# Altium PCB PCB1.PcbDoc
Units mm, origin at the board's own origin, x right, y up, seen from the top; angles counter-clockwise.
Board outline 74.42 x 44.2 mm, 2 copper layers (S1, S2); 37 components, 26 nets, 151 pads, 34 vias.
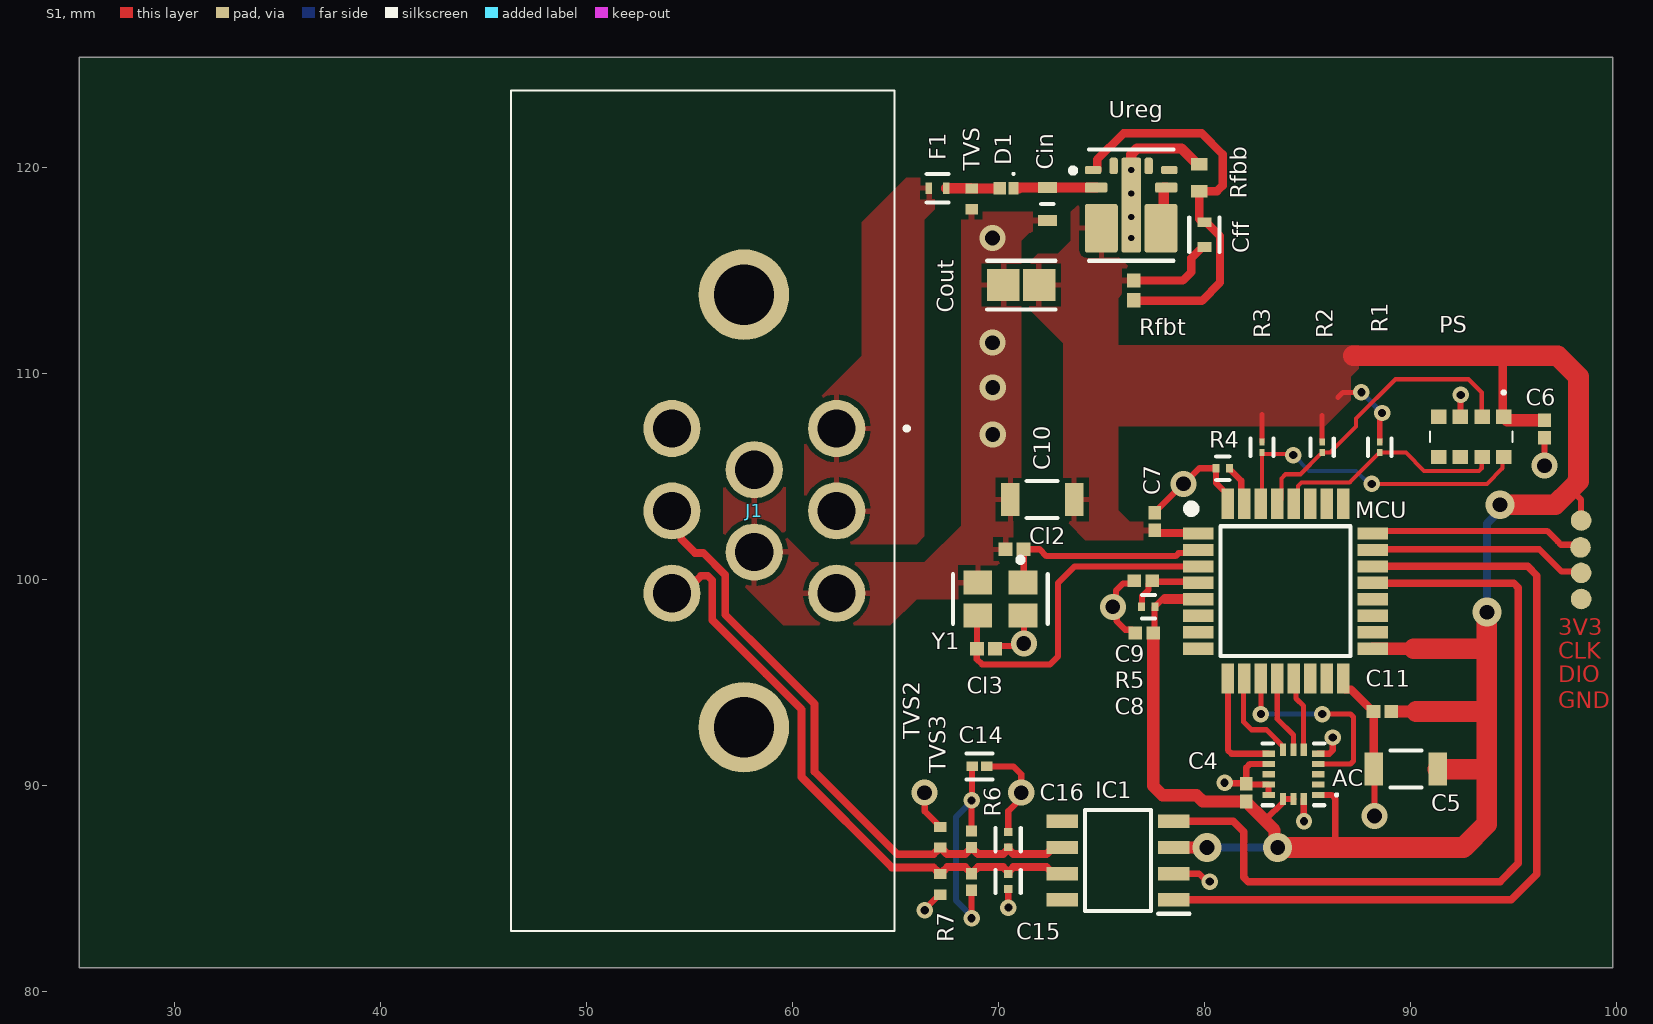
[diagram p0: S1 view]
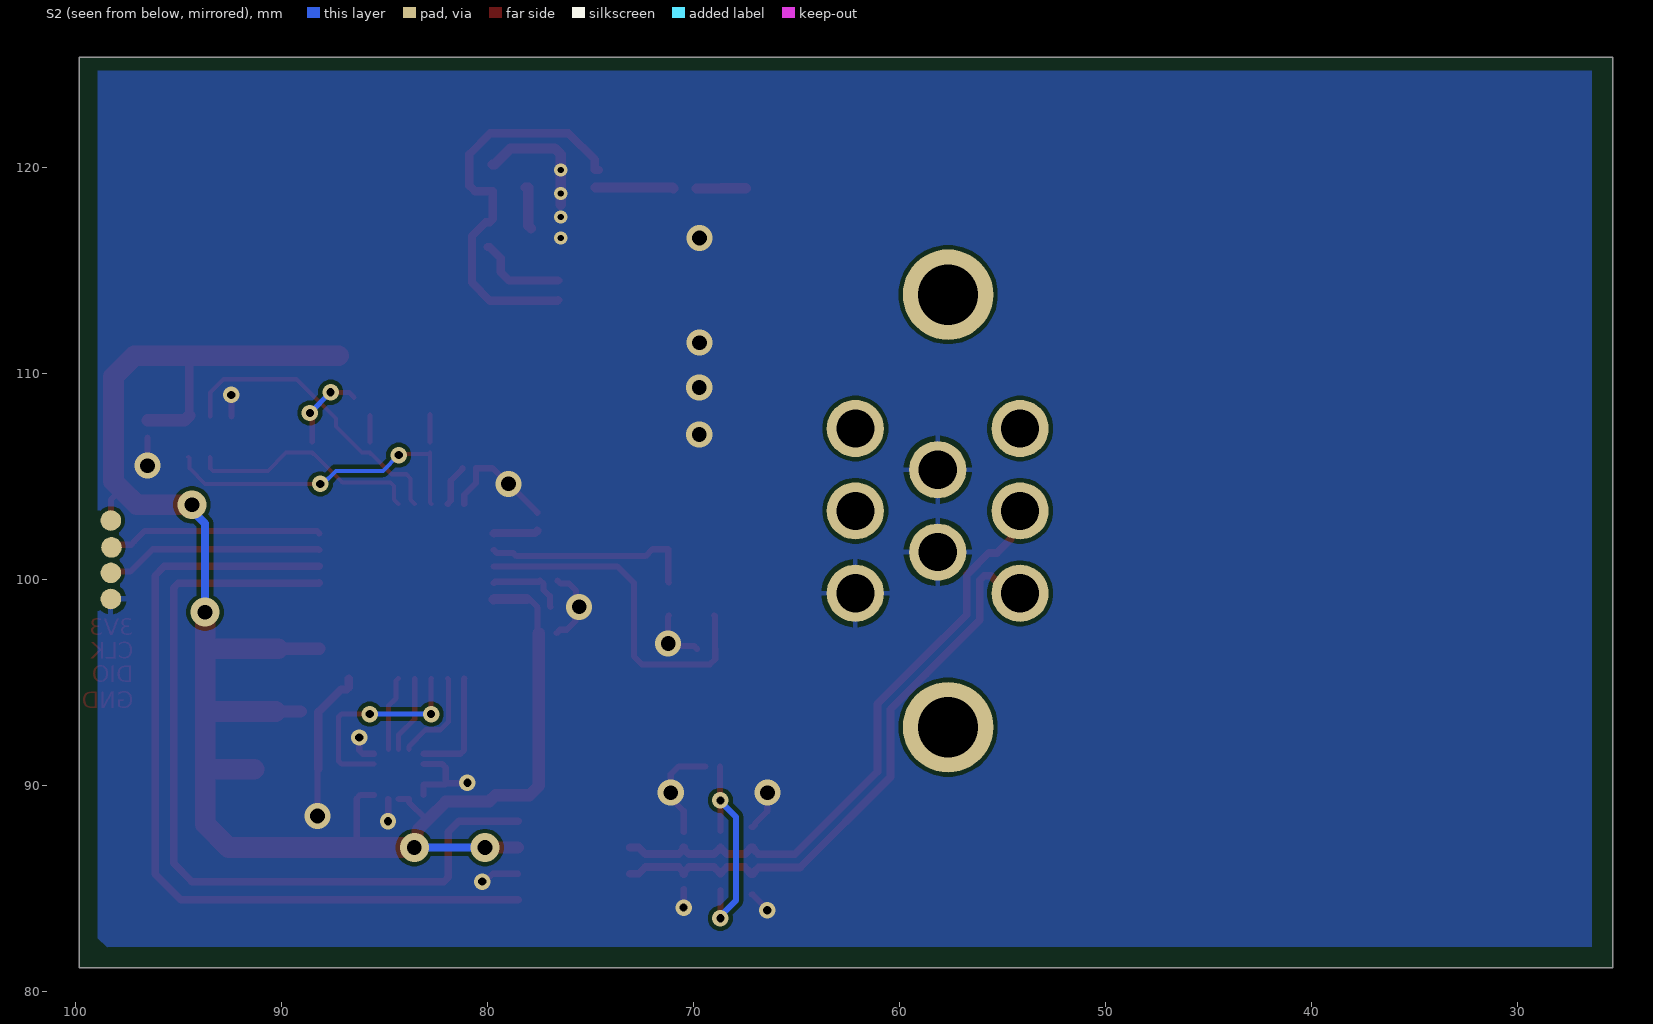
[diagram p1: S2 view, seen from below]
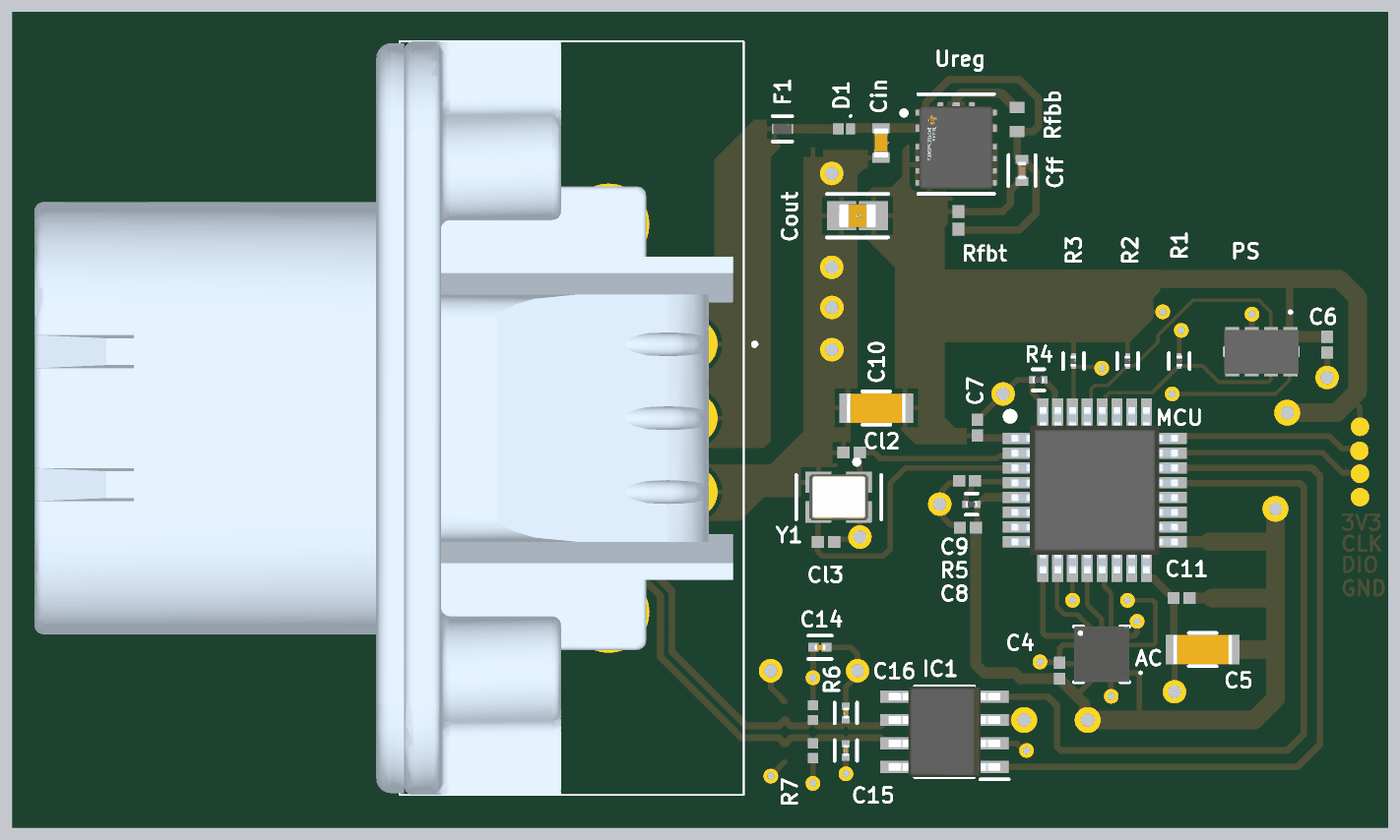
[diagram p2: 3D render of the assembled board from above, using the file's embedded part models]

## Layer stack, top to bottom
Top Solder: solder mask 0.0102, Solder Resist, Dk 3.5
S1: signal copper 0.0356
Dielectric 1: dielectric 0.32, FR-4, Dk 4.8
S2: signal copper 0.0356
Bottom Solder: solder mask 0.0102, Solder Resist, Dk 3.5

## Board outline
25.4,81.153 99.822,81.153 99.822,125.349 25.4,125.349

## Design rules (kind name [scope] priority, off if disabled: settings)
BoardOutlineClearance [All] p1: gap=0.5 ignorepadtopadclearanceinfootprint=FALSE
Clearance [All] p1: gap=0.2 ignorepadtopadclearanceinfootprint=TRUE
DiffPairsRouting [All] p1: maxlimit=0.254 minlimit=0.254 mostfreqgap=0.254 toplayer_minwidth=0.381 toplayer_maxwidth=0.381 toplayer_prefwidth=0.381 bottomlayer_minwidth=0.381 bottomlayer_maxwidth=0.381 bottomlayer_prefwidth=0.381 maxuncoupledlength=12.7
Height [All] p1: minheight=0 maxheight=100 prefheight=12.7
HoleSize [All] p1: absolutevalues=TRUE maxlimit=6 minlimit=0.15 maxpercent=80.000 minpercent=20.000
HoleToHoleClearance [All] p1: gap=0.3 allowstackedmicrovias=TRUE
MinimumSolderMaskSliver [All] p1: minsoldermaskwidth=0.3
PolygonConnect PolygonConnect_1 [InNet('V_IN') vs InNet('V_IN')] p1: thpad.connectstyle=Relief thpad.reliefconductorwidth=0.254 thpad.reliefentries=4 thpad.polygonreliefangle="90 Angle" thpad.airgapwidth=0.254 smdpad.connectstyle=Relief smdpad.reliefconductorwidth=0.2 smdpad.reliefentries=2 smdpad.polygonreliefangle="90 Angle" smdpad.airgapwidth=0.15 via.connectstyle=Relief via.reliefconductorwidth=0.254 via.reliefentries=4 via.polygonreliefangle="90 Angle" via.airgapwidth=0.254
PolygonConnect [All] p2: thpad.connectstyle=Relief thpad.reliefconductorwidth=0.254 thpad.reliefentries=4 thpad.polygonreliefangle="90 Angle" thpad.airgapwidth=0.254 smdpad.connectstyle=Relief smdpad.reliefconductorwidth=0.254 smdpad.reliefentries=4 smdpad.polygonreliefangle="90 Angle" smdpad.airgapwidth=0.254 via.connectstyle=Direct via.reliefconductorwidth=0.254 via.reliefentries=4 via.polygonreliefangle="90 Angle" via.airgapwidth=0.254
RoutingVias [All] p1: holewidth=0.4 width=0.8 viastyle="Through Hole" minholewidth=0.3 minwidth=0.65 maxholewidth=2 maxwidth=6
SilkToSolderMaskClearance [IsPad] p1: minsilkscreentomaskgap=0.3 clearancetoexposedcopper=TRUE
SolderMaskExpansion [All] p1: expansion=0 istentingtop=FALSE
SupplyNets "Schematic Supply Nets_2" [InNet('3V3')] p1: voltage=0.000
SupplyNets "Schematic Supply Nets_1" [InNet('+12')] p2: voltage=0.000
SupplyNets "Schematic Supply Nets" [InNet('GND')] p3: voltage=0.000
Width [All] p1: maxlimit=1 minlimit=0.11 preferedwidth=0.25
24 further rules are at their usual default settings.

## Classes and differential pairs
differential pair CAN: +CAN_H -CAN_L

## Components (designator, comment, footprint, x,y, rotation, side; value= is the part's Value field where it differs from the comment)
AC "H3LIS331DL" LIS3DHTR 84.328,90.551 r180 top
C4 "100nF" CAPC1005X55X30NL05T10 82.042,89.662 r270 top
C5 "10uF" WCAP-CSGP_1206_L3.2W1.6H1.6 89.789,90.805 r0 top
C6 "100nF" CAPC1005X55X30NL05T10 96.52,107.315 r90 top
C7 "100nF" CAPC1005X55X30NL05T10 77.597,102.821 r270 top
C8 "100nF" CAPC1005X55X30NL05T10 77.089,97.409 r0 top
C9 "100nF" CAPC1005X55X30NL05T10 77.04,99.949 r0 top
C10 "10uF" WCAP-CSGP_1206_L3.2W1.6H1.6 72.136,103.886 r0 top
C11 "100nF" CAPC1005X55X30NL05T10 88.646,93.599 r0 top
C14 "4n7F" FP-0201-L_0_6_0_03-W_0_3-IPC_A 69.088,90.932 r0 top
C15 "100pF" FP-CGA1A-0_1-0_03-IPC_B 70.485,85.344 r270 top
C16 "100pF" FP-CGA1A-0_1-0_03-IPC_B 70.485,87.376 r90 top
Cff "330pF" FP-CGA2B-IPC_A 80.01,116.748 r90 top
Cin "1uF" CAPC1608X90N 72.39,118.237 r90 top
Cl2 "10pF" CAPC1005X56X25NL10T15 70.798,101.473 r0 top
Cl3 "10pF" CAPC1005X56X25NL10T15 69.41,96.647 r0 top
Cout "33uF" FP-C2012-125-0_2-IPC_A 71.12,114.3 r180 top
D1 "1A 50V 0402" ONSC-DSN-2-152AC-01_V 70.374,118.999 r270 top
F1 "0.75A 0402" FP-F0402G-MFG 67.056,118.999 r0 top value=3.4Ω
IC1 "SN65HVD232QD" SOIC127P600X175-8N 75.819,86.36 r180 top
J1 "battery" 17762801 62.158,107.337 r270 top locked
MCU "STM32F303K8T6" QFP80P900X900X160-32N 83.947,99.441 r0 top
PS "VCNL4035X01-GS08" VCNL4035X01GS08 92.964,106.934 r0 top
R1 "3KOhm" FP-RMCF0201-IPC_C 88.519,106.426 r90 top
R2 "3KOhm" FP-RMCF0201-IPC_C 85.725,106.426 r90 top
R3 "3KOhm" FP-RMCF0201-IPC_C 82.804,106.426 r90 top
R4 "10k" FP-RT0201-MFG 80.899,105.41 r180 top value=10KΩ
R5 "10k" FP-RT0201-MFG 77.287,98.679 r0 top value=10KΩ
R6 "60Ohm" RESC0201(0603)_M 68.707,87.395 r270 top value="60.40 Ohm"
R7 "60Ohm" RESC0201(0603)_M 68.707,85.325 r270 top value="60.40 Ohm"
Rfbb "2.2kohm" RESC1608X55X25LL10T15 79.756,119.507 r270 top
Rfbt "10kohm" RESC1005X40X25ML05T10 76.581,114.046 r90 top
TVS "82357240030" WE-VE_0402 -1201.293,1388.483 r90 top
TVS2 "82357240030" WE-VE_0402 -1202.817,1355.209 r90 top
TVS3 "82357240030" WE-VE_0402 1337.183,-1182.505 r270 top
Ureg "TPSM84209RKHR" FP-RKH0009A-MFG 76.454,117.983 r0 top
Y1 "24MHz" FP-TSX-3225-MFG 70.104,99.06 r180 top

## Footprints (in the part's own frame and the unit in brackets; to place one, negate y for a bottom-side part, rotate by r counter-clockwise, add the part's x,y. Pads: shape width x height; smd on the part's side, far side on the other; paste and mask are expansions set on the pad)
17762801 [mm]
  round 2.775 hole 1.85: 1(0,0) 2(4,0) 3(8,0) 4(2,-4) 5(6,-4) 6(0,-8) 7(4,-8) 8(8,-8)
  round 4.395 hole 2.93: MH1(-6.5,-4.5) MH2(14.5,-4.5)
  silkscreen extent -16.4,-15.8 24.4,3.5, body extent -16.4,-35.57 24.4,2.23, height 27.76
CAPC1005X55X30NL05T10 [mm] "Chip Capacitor, 2-Leads, Body 1.00x0.50mm, IPC Medium Density"
  rect 0.66x0.62 smd: 1(-0.43,0) 2(0.43,0)
  body extent -0.53,-0.28 0.53,0.27, height 0.55
CAPC1005X56X25NL10T15 [mm] "Chip Capacitor, 2-Leads, Body 1.00x0.50mm, IPC Medium Density"
  rect 0.68x0.64 smd: 1(-0.44,0) 2(0.44,0)
  body extent -0.55,-0.3 0.55,0.3, height 0.56
CAPC1608X90N [mm]
  rect 0.54x0.94 smd: 1(-0.8,0) 2(0.8,0)
  silkscreen extent 0,-0.3 0,0.3, body extent -0.8,-0.4 0.8,0.4, height 0.8
FP-0201-L_0_6_0_03-W_0_3-IPC_A [mm]
  rect 0.554x0.463 smd paste+0 mask+0: 1(-0.354,0) 2(0.354,0)
  silkscreen extent -0.63,-0.63 0.63,0.63, body extent -0.83,-0.43 0.83,0.43, height 0.25
FP-C2012-125-0_2-IPC_A [mm]
  rect 1.578x1.556 smd paste+0 mask+0: 1(-0.864,0) 2(0.864,0)
  silkscreen extent -1.65,-1.18 1.65,1.18, body extent -2.15,-1.28 2.15,1.28, height 0.25
FP-CGA1A-0_1-0_03-IPC_B [mm]
  rect 0.383x0.418 smd paste+0 mask+0: 1(-0.367,0) 2(0.367,0)
  silkscreen extent -0.56,-0.61 0.56,0.61, body extent -0.71,-0.36 0.71,0.36, height 0.25
FP-CGA2B-IPC_A [mm]
  rect 0.472x0.672 smd paste+0 mask+0: 1(-0.6,0) 2(0.6,0)
  silkscreen extent -0.84,-0.74 0.84,0.74, body extent -1.04,-0.54 1.04,0.54, height 0.25
FP-F0402G-MFG [mm]
  rect 0.31x0.55 smd paste+0 mask+0: 1(-0.42,0) 2(0.42,0)
  silkscreen extent -0.53,-0.68 0.53,0.68, body extent -0.67,-0.41 0.67,0.41, height 0.25
FP-RKH0009A-MFG [mm]
  rrect50% 0.8x0.4 smd paste-1000 mask-1000: 1(-1.85,1.9) 6(1.85,1.9)
  rrect40% 1.1x0.5 smd paste-1000 mask-1000: 2(-1.7,1.05) 5(1.7,1.05)
  rrect13% 1.6x2.35 smd paste-1000 mask-1000: 3(-1.45,-0.925) 4(1.45,-0.925)
  rrect50% 0.4x0.8 smd paste-1000 mask-1000: 7(0.85,2.1) 9(-0.85,2.1)
  rrect21% 0.96x4.6 smd paste-1000 mask-1000: 8(0,0.2)
  silkscreen extent -2.95,-2.5 2.05,2.9, body extent -2.35,-2.4 2.35,2.6, height 0.25
FP-RMCF0201-IPC_C [mm]
  rect 0.354x0.263 smd paste+0 mask+0: 1(-0.254,0) 2(0.254,0)
  silkscreen extent -0.43,-0.57 0.43,0.57, body extent -0.53,-0.27 0.53,0.26, height 0.25
FP-RT0201-MFG [mm]
  rect 0.35x0.4 smd paste+0 mask+0: 1(-0.325,0) 2(0.325,0)
  silkscreen extent -0.32,-0.57 0.32,0.58, body extent -0.6,-0.3 0.6,0.3, height 0.25
FP-TSX-3225-MFG [mm]
  rect 1.4x1.15 smd paste+0 mask+0: 1(-1.1,-0.8) 2(1.1,-0.8) 3(1.1,0.8) 4(-1.1,0.8)
  silkscreen extent -2.3,-2.02 2.3,1.2, body extent -1.9,-1.48 1.9,1.48, height 0.25
LIS3DHTR [mm]
  rect 0.6x0.3 smd: 1(-1.2,1) 2(-1.2,0.5) 3(-1.2,0) 4(-1.2,-0.5) 5(-1.2,-1) 9(1.2,-1) 10(1.2,-0.5) 11(1.2,0) 12(1.2,0.5) 13(1.2,1)
  rect 0.3x0.6 smd: 6(-0.5,-1.2) 7(0,-1.2) 8(0.5,-1.2) 14(0.5,1.2) 15(0,1.2) 16(-0.5,1.2)
  silkscreen extent -2.16,-1.5 1.5,1.5, body extent -1.5,-1.5 1.5,1.5, height 1
ONSC-DSN-2-152AC-01_V [mm] "DSN, 2-Leads, Body 1x0.6mm"
  rect 0.6x0.47 smd: 1(0,0.365)
  rect 0.6x0.6 smd: 2(0,-0.3)
  silkscreen extent -0.75,0.32 -0.65,0.42, body extent -0.3,-0.5 0.3,0.5, height 0.31
QFP80P900X900X160-32N [mm]
  rect 1.475x0.6 smd: 1(-4.238,2.8) 2(-4.238,2) 3(-4.238,1.2) 4(-4.238,0.4) 5(-4.238,-0.4) 6(-4.238,-1.2) 7(-4.238,-2) 8(-4.238,-2.8) 17(4.238,-2.8) 18(4.238,-2) 19(4.238,-1.2) 20(4.238,-0.4) 21(4.238,0.4) 22(4.238,1.2) 23(4.238,2) 24(4.238,2.8)
  rect 0.6x1.475 smd: 9(-2.8,-4.238) 10(-2,-4.238) 11(-1.2,-4.238) 12(-0.4,-4.238) 13(0.4,-4.238) 14(1.2,-4.238) 15(2,-4.238) 16(2.8,-4.238) 25(2.8,4.238) 26(2,4.238) 27(1.2,4.238) 28(0.4,4.238) 29(-0.4,4.238) 30(-1.2,4.238) 31(-2,4.238) 32(-2.8,4.238)
  silkscreen extent -4.77,-3.15 3.15,4.2, body extent -4.5,-4.5 4.5,4.5, height 1.6
RESC0201(0603)_M [mm] "Chip Resistor, Body 0.6x0.3mm, IPC Low Density"
  rect 0.55x0.55 smd: 1(-0.4,0) 2(0.4,0)
  body extent -0.31,-0.16 0.31,0.16, height 0.3
RESC1005X40X25ML05T10 [mm] "Chip Resistor, 2-Leads, Body 1.00x0.50mm, IPC Low Density"
  rect 0.7x0.65 smd: 1(-0.475,0) 2(0.475,0)
  body extent -0.53,-0.27 0.53,0.28, height 0.4
RESC1608X55X25LL10T15 [mm] "Chip Resistor, 2-Leads, Body 1.60x0.80mm, IPC High Density"
  rect 0.6x0.8 smd: 1(-0.65,0) 2(0.65,0)
  body extent -0.85,-0.45 0.85,0.45, height 0.55
SOIC127P600X175-8N [mm]
  rect 1.525x0.65 smd: 1(-2.712,1.905) 2(-2.712,0.635) 3(-2.712,-0.635) 4(-2.712,-1.905) 5(2.712,-1.905) 6(2.712,-0.635) 7(2.712,0.635) 8(2.712,1.905)
  silkscreen extent -3.47,-2.45 1.6,2.58, body extent -3.01,-2.45 3.01,2.45, height 1.63
VCNL4035X01GS08 [mm]
  rect 0.75x0.7 smd: 1(1.575,0.98) 2(0.525,0.98) 3(-0.525,0.98) 4(-1.575,0.98) 5(-1.575,-0.98) 6(-0.525,-0.98) 7(0.525,-0.98) 8(1.575,-0.98)
  silkscreen extent -2,-0.25 2,2.2, body extent -2,-1.18 2,1.18, height 0.85
WCAP-CSGP_1206_L3.2W1.6H1.6 [mm] "Ceramic Capacitors, body 3.2x1.6mm"
  rect 0.9x1.6 smd: 1(-1.55,0) 2(1.55,0)
  silkscreen extent -0.75,-0.9 0.75,0.9, body extent -1.6,-0.8 1.6,0.8, height 1.6
WE-VE_0402 [mm] "ESD Suppressor, size 0402, body 1x0.5mm"
  rect 0.5x0.6 smd: 1(-1270.5,-1270) 2(-1269.5,-1270)
  body extent -1270.5,-1270.25 -1269.5,-1269.75, height 0.6

## Part data
AC: "Accelerometer", Manufacturer_Name=STMicroelectronics, Mouser Part Number=511-H3LIS331DL, Arrow Part Number=H3LIS331DL, Arrow Price/Stock=https://www.arrow.com/en/products/h3lis331dl/stmicroelectronics?utm_currency=USD&region=europe, Datasheet Link=http://www.st.com/st-web-ui/static/active/en/resource/technical/document/datasheet/DM00053090.pdf, Height=1mm, Manufacturer_Part_Number=H3LIS331DL, Mouser Price/Stock=https://www.mouser.co.uk/ProductDetail/STMicroelectronics/H3LIS331DL?qs=TAo1I7FhABscb2spafvd4Q%3D%3D
C4 C6 C7 C8 C9 C11: library part CMP-2008-03089-1, "C0402C104Z8VACTU", Manufacturer=Kemet, Part Number=C0402C104Z8VACTU
C5 C10: library part CMP-03913-65419745-2, "10μF ±20% 6.3V Ceramic Capacitor X5R 1206 (3216 Metric) MPN: 885012108002", Capacitance=10µF, Case Code (Imperial)=1206, Case Code (Metric)=3216, Dielectric=X5R, Insulation Resistance=5MΩ, Max Operating Temperature=85°C, Min Operating Temperature=-55°C, Tolerance=20%, Voltage Rating=6.3V, Case/Package=1206, Height=1.6mm, Length=3.2mm, Mount="Surface Mount", RoHS=Compliant, Thickness=1.905mm, Voltage Rating (DC)=6.3V, Width=1.6mm
C14: library part CMP-14477-003729-2, "EMK063BJ472KP-F", Capacitance=4.7nF, Case Code (Imperial)=0201, Case Code (Metric)=0603, Dielectric=X5R, Max Operating Temperature=85°C, Min Operating Temperature=-55°C, Package Quantity=10, Tolerance=10%, Voltage Rating=16V, Case/Package=0201, Construction=Flat, Depth=0.3mm, Halogen Free="Halogen Free", Height=0.3mm, Lead Free="Lead Free", Length=0.024inch, Mount="Surface Mount", Packaging="Tape and Reel", Radiation Hardening=No, RoHS Compliant=Yes, Series=M, Termination=SMD/SMT, Thickness=0.013inch, Voltage Rating (DC)=16V, Width=0.012inch
C15 C16: library part CMP-08246-001685-1, "Cap Ceramic 100pF 16V X7R 20% Pad SMD 0201 125°C Automotive T/R MPN: CGA1A2X7R1C101M030BA", Case Code (Imperial)=0201, Case Code (Metric)=0603, Max Operating Temperature=125°C, Min Operating Temperature=-55°C, Package Quantity=15000, Ratings=AEC-Q200, Tolerance=20%, Voltage Rating=16V, Capacitance=100pF, Case/Package=0201, Length=0.024inch, Mount="Surface Mount", Packaging="Tape and Reel", Thickness=0.012inch, Width=0.012inch
Cff: library part CMP-08246-002132-1, "Cap Ceramic 330pF 50V X7R 10% Pad SMD 0402 +125°C Automotive T/R MPN: CGA2B2X7R1H331K050BA", Case Code (Imperial)=0402, Case Code (Metric)=1005, Dielectric=X7R, Max Operating Temperature=125°C, Min Operating Temperature=-55°C, Package Quantity=1, Ratings=AEC-Q200, Tolerance=10%, Voltage Rating=50V, Capacitance=330pF, Case/Package=0402, Composition=Ceramic, Depth=0.5mm, Height=0.5mm, Length=1mm, Mount="Surface Mount", Packaging="Tape and Reel", Radiation Hardening=No, REACH SVHC="No SVHC", Termination=SMD/SMT, Thickness=0.022inch, Voltage Rating (DC)=50V, Weight=2.3E-05oz, Width=0.02inch
Cin: library part CGA3E3X5R1V105K080AB, "CGA3E3X5R1V105K080AB", Manufacturer_Name=TDK, Mouser Part Number=810-CGA3E3X5R1V105KB, Arrow Part Number=CGA3E3X5R1V105K080AB, Arrow Price/Stock=https://www.arrow.com/en/products/cga3e3x5r1v105k080ab/tdk, Datasheet Link=http://docs-europe.electrocomponents.com/webdocs/14e9/0900766b814e9125.pdf, Height=0.9mm, Manufacturer_Part_Number=CGA3E3X5R1V105K080AB, Mouser Price/Stock=https://www.mouser.co.uk/ProductDetail/TDK/CGA3E3X5R1V105K080AB?qs=xLDY6iXSiQaCrQAC%2FpSDdg%3D%3D
Cl2 Cl3: library part CMP-2008-02993-1, Manufacturer="AVX Interconnect / Elco", Part Number=LD025A100JAB2A
Cout: library part CMP-08246-002720-1, "Multilayer Ceramic Capacitors 33μF ±20% 10V X5R SMD 0805 MPN: C2012X5R1A336M125AC", Case Code (Imperial)=0805, Case Code (Metric)=2012, Dielectric=X5R, Dielectric Material=Ceramic, Max Operating Temperature=85°C, Min Operating Temperature=-55°C, Package Quantity=1, Tolerance=20%, Voltage Rating=10V, Capacitance=33uF, Case/Package=0805, Depth=1.25mm, Height=1.25mm, Lead Free="Lead Free", Length=2mm, Mount="Surface Mount", Packaging="Tape and Reel", REACH SVHC="No SVHC", Resistor Type=Ceramic, RoHS Compliant=Yes, Series=C, Termination=SMD/SMT, Thickness=0.057inch, Voltage Rating (DC)=10V, Weight=0.000194oz, Width=0.049inch
D1: library part CMP-1055-00232-1, "Schottky Barrier Diode, 2-Pin DSN, Pb-Free, Tape and Reel", Manufacturer="On Semiconductor", PartNumber=NSR05F40NXT5G, ComponentLink1Description="Manufacturer URL", ComponentLink1URL=http://www.onsemi.com/, ComponentLink2Description=Datasheet, ComponentLink2URL=http://www.onsemi.cn/pub_link/Collateral/NSR05F40.PDF, ComponentLink3Description="Package Specification", ComponentLink3URL=http://www.onsemi.cn/pub_link/Collateral/152AC.PDF, Configuration=Single, DatasheetVersion="Rev. 3", IFSM Max (A)=10, Mounting Technology="Surface Mount", PackageDescription="2-Pin Micro Molded Package, Body 1 x 0.6 mm", PackageReference=DSN-2-152AC-01, PackageVersion="Rev. C, 01/2011", Packing="Tape and Reel", RoHS=TRUE
F1: library part CMP-04585-000002-1, "original MPN: F0402G0R05FNTR", Fuse Current=50mA, Fuse Voltage Drop=250mV, Manufacturer="AVX Corporation", Manufacturer Part Number=F0402G0R05FNTR, Package=F0402G, Resistance=3.4Ω, Temperature="-55°C to +125°C", Temperature Range High=+125°C, Temperature Range Low=-55°C, Voltage Rating=32V, Automotive=No, Category=Fuse, ComponentLink2Description=Datasheet, ComponentLink2URL=http://datasheets.avx.com/AccuGuardLC_0402.pdf, Device Class L1="Circuit Protection", Device Class L2=Fuses, Device Class L3=unset, Digikey Description="FUSE BOARD MOUNT 50MA 32VDC 0402", Fuse Blow Speed=Fast, Height=0.4mm, Lead Free=Yes, Mouser Description="Surface Mount Fuses 0402 50mA fuse", Octopart=https://octopart.com/f0402g0r05fntr-avx-19631750, RoHS=TRUE
IC1: "Integrated Circuit", Manufacturer_Name="Texas Instruments", Mouser Part Number=595-SN65HVD232QD, Arrow Part Number=SN65HVD232QD, Arrow Price/Stock=https://www.arrow.com/en/products/sn65hvd232qd/texas-instruments?utm_currency=USD&region=nac, Datasheet Link=http://www.ti.com/lit/ds/symlink/sn65hvd232q.pdf, Height=1.75mm, Manufacturer_Part_Number=SN65HVD232QD, Mouser Price/Stock=https://www.mouser.co.uk/ProductDetail/Texas-Instruments/SN65HVD232QD?qs=QViXGNcIEAvrVVwvVef1Yg%3D%3D
J1: library part 1-776280-1, "Connector", Manufacturer_Name="TE Connectivity", Mouser Part Number=571-1-776280-1, Arrow Part Number=1-776280-1, Arrow Price/Stock=https://www.arrow.com/en/products/1-776280-1/te-connectivity?region=nac, Datasheet Link=http://www.te.com/commerce/DocumentDelivery/DDEController?Action=srchrtrv&DocNm=776280&DocType=Customer+Drawing&DocLang=English, Height=32.1mm, Manufacturer_Part_Number=1-776280-1, Mouser Price/Stock=https://www.mouser.co.uk/ProductDetail/TE-Connectivity/1-776280-1?qs=tLAa1RwIH6eAcibenGXn4g%3D%3D
MCU: "Integrated Circuit", Manufacturer_Name=STMicroelectronics, Mouser Part Number=511-STM32F303K8T6, Arrow Part Number=STM32F303K8T6, Arrow Price/Stock=https://www.arrow.com/en/products/stm32f303k8t6/stmicroelectronics?utm_currency=USD&region=nac, Datasheet Link=https://www.st.com/resource/en/datasheet/stm32f303c6.pdf, Height=1.6mm, Manufacturer_Part_Number=STM32F303K8T6, Mouser Price/Stock=https://www.mouser.co.uk/ProductDetail/STMicroelectronics/STM32F303K8T6?qs=9MuLHSkliconZih9IS1ieg%3D%3D
PS: "Integrated Circuit", Manufacturer_Name=Vishay, Mouser Part Number=78-VCNL4035X01-GS08, Arrow Part Number=VCNL4035X01-GS08, Arrow Price/Stock=https://www.arrow.com/en/products/vcnl4035x01-gs08/vishay?region=nac, Datasheet Link=https://www.vishay.com/docs/84251/vcnl4035x01.pdf, Height=0.75mm, Manufacturer_Part_Number=VCNL4035X01-GS08, Mouser Price/Stock=https://www.mouser.co.uk/ProductDetail/Vishay-Semiconductors/VCNL4035X01-GS08?qs=yrkI9Pv0ezBEPRCjkOcFyQ%3D%3D
R1: library part CMP-26527-003145-1, "3kΩ ±5% 0.05W 0201 Thick Film Chip Resistor AEC-Q200 compliant", Case Code (Imperial)=0201, Case Code (Metric)=0603, Max Operating Temperature=125°C, Max Power Dissipation=50mW, Min Operating Temperature=-55°C, Resistance=3kR, Resistor Type="Thick Film", Temperature Coefficient=200ppm/°C, Tolerance=5%, Case/Package=0201, Contact Plating=Tin, Height=0.009inch, Length=0.024inch, Mount="Surface Mount", Number of Terminations=2, Packaging="Tape and Reel", Radiation Hardening=No, RoHS Compliant=Yes, Series=RMCF, Width=0.012inch
R2: library part CMP-26527-003145-1, "3kΩ ±5% 0.05W 0201 Thick Film Chip Resistor AEC-Q200 compliant MPN:RMCF0201JT3K00", Case Code (Imperial)=0201, Case Code (Metric)=0603, Max Operating Temperature=125°C, Max Power Dissipation=50mW, Min Operating Temperature=-55°C, Resistance=3kR, Resistor Type="Thick Film", Temperature Coefficient=200ppm/°C, Tolerance=5%, Case/Package=0201, Contact Plating=Tin, Height=0.009inch, Length=0.024inch, Mount="Surface Mount", Number of Terminations=2, Packaging="Tape and Reel", Radiation Hardening=No, RoHS Compliant=Yes, Series=RMCF, Width=0.012inch
R3: library part CMP-26527-003145-1, "3kΩ ±5% 0.05W 0201 Thick Film Chip Resistor AEC-Q200 compliant MPN: RMCF0201JT3K00", Case Code (Imperial)=0201, Case Code (Metric)=0603, Max Operating Temperature=125°C, Max Power Dissipation=50mW, Min Operating Temperature=-55°C, Resistance=3kR, Resistor Type="Thick Film", Temperature Coefficient=200ppm/°C, Tolerance=5%, Case/Package=0201, Contact Plating=Tin, Height=0.009inch, Length=0.024inch, Mount="Surface Mount", Number of Terminations=2, Packaging="Tape and Reel", Radiation Hardening=No, RoHS Compliant=Yes, Series=RMCF, Width=0.012inch
R4 R5: library part CMP-03412-006200-1, "RT0201 10KΩ 0.05W 50 ppm/°C 0.10% MPN: RT0201BRE0710KL", Manufacturer=Yageo, Manufacturer Part Number=RT0201BRE0710KL, Package=RT0201, Power Rating=0.05W, Resistance=10KΩ, Temperature="-55°C to +125°C", Temperature Coefficient="50 ppm/°C", Temperature Range High=+125°C, Temperature Range Low=-55°C, Tolerance=0.001, Voltage Rating=25V, Automotive=No, Category=Res, ComponentLink2Description=Datasheet, ComponentLink2URL=http://www.yageo.com/documents/recent/PYu-RT_1-to-0.01_RoHS_L_9.pdf, Composition="Thin Film", Device Class L1="Passive Components", Device Class L2=Resistors, Device Class L3="Chip SMD Resistors", Footprint Url=http://www.yageo.com/exep/pages/download/literatures/PYu-R_Mount_10.pdf, Height=0.26mm, Ipc Land Pattern Name=RESC6030X23, Lead Free=Yes, Octopart=https://octopart.com/rt0201bre0710kl-yageo-87214258, RoHS=TRUE, Series=RT
R6 R7: library part CMP-1010-00278-1, "60R4 0.05W 1% 0201 (0603 Metric)  SMD", Case-EIA=0201, Case-Metric=0603, Power="0.05 W", Tolerance="1 %", Technology=SMT
Rfbb: library part CMP-2000-06934-1, "Thick Film Resistor, 2.2 KOhm, 100 mW, 50 V, +/- 1%, -55 to 155 degC, 2-Pin SMD (0603), RoHS, Tape and Reel MPN RC0603FR-072K2L", Case Code - in=0603, Case Code - mm=1608, Manufacturer=Yageo, Operating Temperature Range=-55Cto+155C, Package Description="2-Pin Surface Mount Device, Body 1.6 x 0.8 mm", Power Rating=100mW, Resistance=2.2kOhms, Temperature Coefficient=100PPM/C, Tolerance=1%, Voltage Rating=50V, Datasheet URL=http://www.yageo.com/documents/recent/PYu-RC_Group_51_RoHS_L_7.pdf, Datasheet Version="Rev. 7, 05/2017", Manufacturer URL=http://www.yageo.com/, Mounting Technology=SurfaceMount, Package Reference=0603, Packaging=Reel, Product=ThickFilmResistorsGeneralPurpose, Series=RC, Termination Style=SMD/SMT
Rfbt: library part CMP-2002-03043-1, "CRCW040210K0FKED", Manufacturer="Vishay Dale", Part Number=CRCW040210K0FKEDHP
TVS TVS2 TVS3: library part CMP-1422-00005-2, Case Code (Metric)=0402, Insulation Resistance=10MΩ, Leakage Current=1µA, Operating Supply Voltage=24V, Case/Package=0402, Height=600µm, Length=1mm, NexarPartId=88496629, RoHS=Non-Compliant, Width=500µm
Ureg: library part CMP-04918-000417-1, "DC DC CONVERTER 1.2-6V"
Y1: library part CMP-36405-000018-1, "CRYSTAL 24.0000MHZ 9PF SMD", Case/Package=SMD/SMT, ESR (Equivalent Series Resistance)=40R, Frequency Stability=20ppm, Frequency Tolerance=10ppm, Load Capacitance=9pF, Max Operating Temperature=105°C, Min Operating Temperature=-40°C, Package Quantity=250, Depth=2.5mm, Drive Level=200uW, Frequency=24MHz, Height=0.024inch, Lead Free="Lead Free", Length=3.2mm, Mount="Surface Mount", Number of Pins=4, Packaging="Tape and Reel", RoHS Compliant=Yes, Series=TSX-3225, Termination=SMD/SMT, Tolerance=10ppm, Weight=0.000564oz, Width=2.5mm

## Free pads (board coordinates)
  round 1 all layers, no hole: 7(98.267,101.567) 7(98.298,99.06) 7(98.298,100.33) 7(98.298,102.87)

## Via types
v1: diameter 0.8, hole 0.4, S1 to S2, 15 vias
v2: diameter 1.27, hole 0.711, S1 to S2, 11 vias
v3: diameter 1.4, hole 0.711, S1 to S2, 4 vias
v4: diameter 0.65, hole 0.3, S1 to S2, 4 vias

## Nets (pads, with @x,y where several pads share a name; then routed paths per layer and width w, separated by ;. In a path a pad name is that pad's centre, name@x,y a point inside that pad or via, vN(x,y) a via of type N, cw(c..) or ccw(c..) an arc to the next point about the centre after c; other vN are vias at no path point)
3V3: AC.1 AC.14 AC.15 C4.2 C5.2 C6.2 C7.2 C8.2 C10.2 C11.2 Cff.1 Cout.1 IC1.3 MCU.1 MCU.5 MCU.17 pad.7@98.298,102.87 PS.1 R1.2 R2.2 R3.2 R5.2 Rfbt.2 Ureg.3 | length 108.9
  S1 w0.25: R3.2 82.804,108.018 ; R2.2 85.725,107.959 ; 86.487,108.839 86.741,109.093 v1(87.63,109.093) ; R1.2 88.519,107.827 88.633,107.941 v1(88.633,108.09)
  S1 w0.3: C8.2 77.587,97.477 77.587,98.654 R5.2 77.612,98.704 77.968,99.06 78.105,99.06 ; 82.896,88.357 82.985,88.357 83.828,89.201 AC.14 AC.15 ; AC.1 86.184,89.551 86.36,89.375 86.36,86.995 ; 97.79,104.394 98.298,103.886 pad.7@98.298,102.87 ; 98.171,104.775 98.221,104.725
  S1 w0.4: Rfbt.2 78.961,114.521 79.375,114.935 79.375,115.613 79.91,116.148 Cff.1 ; C7.2 77.597,102.372 77.707,102.262 79.688,102.262 MCU.1 ; PS.1@94.488,107.965 94.488,110.871
  S1 w0.5: 78.105,99.06 79.69,99.06 MCU.5
  S1 w0.6: C8.2 77.519,89.994 77.978,89.535 79.629,89.535 79.932,89.232 C4.2 82.042,89.212 82.896,88.357 83.413,87.841 83.413,87.148 v3(83.566,86.995) ; IC1.3 v3(80.136,86.995) ; MCU.17 90.164,96.641 90.17,96.647 ; C11.2 90.297,93.599 ; PS.1@94.488,107.965 94.708,107.745 C6.2
  S1 w1: v3(83.566,86.995) 86.36,86.995 92.583,86.995 93.722,88.134 93.722,90.805 ; 87.249,110.871 94.488,110.871 97.155,110.871 98.171,109.855 98.171,104.775 97.79,104.394 97.028,103.632 v3(94.361,103.632) ; 90.17,96.647 93.595,96.647 93.722,96.774 ; 90.297,93.599 93.722,93.599 ; C5.2 93.722,90.805 ; v3@93.722,98.421 93.722,96.774 ; 93.722,90.805 93.722,93.599 ; 93.722,93.599 93.722,96.774
  S2 w0.25: v1(87.63,109.093) v1(88.633,108.09)
  S2 w0.4: v3(80.136,86.995) v3(83.566,86.995) ; v3(93.726,98.425) 93.726,102.726 94.361,103.361 v3(94.361,103.632)
+12: F1.1 J1.1 J1.2
AC_CS: AC.8 MCU.10 | length 4.7
  S1 w0.25: MCU.10 81.915,95.171 81.915,93.091 82.296,92.71 83.019,92.71 83.828,91.901 AC.8
AC_INT: AC.9 MCU.9 | length 5.5
  S1 w0.3: MCU.9 81.153,95.197 81.153,91.727 81.329,91.551 AC.9
AC_SDI: AC.6 MCU.13 | length 3.7
  S1 w0.25: MCU.13 84.455,95.095 84.455,94.234 84.828,93.861 AC.6
AC_SDO: AC.7 MCU.12 | length 3.8
  S1 w0.25: MCU.12 83.547,93.237 84.328,92.456 AC.7
AC_SPC: AC.4 MCU.11 | length 10.2
  S1 w0.25: MCU.11 82.749,95.201 82.749,93.479 v1(82.752,93.476) ; AC.4 87.103,91.051 87.249,91.197 87.249,93.326 87.103,93.472 v1(85.725,93.472)
  S2 w0.25: v1(82.752,93.476) 82.756,93.472 v1(85.725,93.472)
BOOT0: MCU.31 R4.1 | length 2
  S1 w0.3: R4.1 81.224,105.385 81.797,104.812 81.797,103.829 MCU.31
CAN_H: C15.1 IC1.7 J1.8 R7.1 TVS2.2 | length 29.3
  S1 w0.381: J1.8 54.726,99.337 55.578,100.189 55.894,100.189 56.117,99.966 56.117,98.038 58.73,95.425 60.452,93.703 60.452,90.415 64.832,86.034 66.85,86.034 67.074,85.811 67.074,85.768 67.133,85.709 TVS2.2 67.233,85.709 67.292,85.768 67.292,85.811 67.524,86.042 68.399,86.042 68.622,85.819 68.622,85.81 R7.1 68.792,85.81 68.792,85.819 69.015,86.042 70.243,86.042 70.467,85.819 70.467,85.712 70.467,85.711 C15.1 70.503,85.711 70.503,85.712 70.503,85.819 70.727,86.042 72.352,86.042 72.669,85.725 IC1.7
CAN_L: C16.1 IC1.6 J1.7 R6.2 TVS3.2 | length 30.6
  S1 w0.381: J1.7 54.616,102.879 54.616,101.969 55.285,101.3 55.681,101.3 56.752,100.229 56.752,98.301 58.993,96.06 61.087,93.966 61.087,90.678 65.095,86.669 66.85,86.669 67.074,86.893 67.074,86.936 67.133,86.995 TVS3.2 67.233,86.995 67.292,86.936 67.292,86.901 67.516,86.677 68.399,86.677 68.622,86.901 68.622,86.91 R6.2 68.792,86.91 68.792,86.901 69.015,86.677 70.243,86.677 70.467,86.901 70.467,87.008 70.467,87.009 C16.1 70.503,87.009 70.503,87.008 70.503,86.901 70.727,86.677 72.352,86.677 72.669,86.995 IC1.6
DRIVER_INPUT: IC1.1 MCU.22 | length 40.8
  S1 w0.36: IC1.1 94.899,84.455 96.139,85.695 96.139,100.203 95.701,100.641 MCU.22
FB: Cff.2 Rfbb.2 Rfbt.1 Ureg.1 | length 20.1
  S1 w0.4: Ureg.1 74.804,119.883 74.804,120.39 76.08,121.666 79.883,121.666 80.899,120.65 80.899,119.126 80.63,118.857 Rfbb.2 79.756,117.502 79.91,117.348 Cff.2 80.11,117.348 80.772,116.686 80.772,114.427 79.883,113.538 76.614,113.538 Rfbt.1
GND: AC.5 AC.10 AC.12 AC.13 AC.16 C4.1 C5.1 C6.1 C7.1 C8.1 C9.1 C10.1 C11.1 C14.2 C15.2 C16.2 Cin.1 Cl2.1 Cl3.2 Cout.2 IC1.2 J1.3 J1.4 J1.5 MCU.16 MCU.32 pad.7@98.298,99.06 PS.3 R4.2 Rfbb.1 TVS2.1 TVS3.1 TVS.1 Ureg.8 Y1.2 Y1.4 | length 46.6
  S1 w0.3: v1(66.43,83.956) 66.43,84.006 67.133,84.709 TVS2.1 ; v2@66.43,89.642 66.43,88.748 67.033,88.145 67.033,88.095 67.133,87.995 TVS3.1 ; C14.2 70.739,90.932 71.12,90.551 v2(71.12,89.662) 71.12,89.4 70.485,88.765 C16.2 ; Cl3.2 69.977,96.774 71.12,96.774 v2(71.247,96.901) 71.247,98.217 Y1.4 ; C15.2 70.489,84.972 70.489,84.087 v1(70.494,84.083) ; C9.1 76.477,99.816 76.067,99.816 75.715,99.464 75.715,98.829 v2(75.565,98.679) 75.751,98.493 75.751,97.985 76.167,97.569 76.499,97.569 C8.1 ; C7.1 77.597,103.271 78.974,104.648 79.004,104.648 79.766,105.41 R4.2 80.574,104.69 81.147,104.117 MCU.32 ; IC1.2 79.748,85.725 80.129,85.344 v1(80.264,85.344) ; v1(80.99,90.141) 81.014,90.117 82.017,90.117 C4.1 ; AC.13 AC.12 82.083,90.051 C4.1 ; AC.10 82.218,91.051 82.042,90.875 C4.1 ; AC.16 84.828,88.29 v1(84.845,88.274) ; AC.5 86.066,91.551 86.242,91.727 v1(86.242,92.338) ; C5.1 88.265,90.779 v2(88.265,88.523) ; PS.3 92.447,107.922 92.447,108.957 v1(92.456,108.966) ; v2(96.52,105.537) C6.1
  S1 w0.4: MCU.16 86.747,94.765 86.847,94.665 87.13,94.665 88.196,93.599 C11.1 88.227,93.588 88.227,90.817 C5.1
  S1 w0.5: Ureg.8 76.454,120.64 76.747,120.933 78.88,120.933 79.656,120.157 Rfbb.1
  other v2: 66.421,89.662 78.994,104.648 69.732,107.044 69.732,109.33 69.723,111.506 69.723,116.586
  other v4: 76.454,116.586 76.454,117.602 76.454,118.745 76.454,119.888
MCU_OSC_2: Cl2.2 MCU.2 Y1.1 | length 10.4
  S1 w0.3: Y1.1 71.238,99.894 Cl2.2 72.009,101.473 72.341,101.141 78.613,101.141 78.763,101.291 79.559,101.291 MCU.2
MCU_OSC_3: Cl3.1 MCU.3 Y1.3 | length 17
  S1 w0.3: Y1.3 68.97,98.226 Cl3.1 68.961,96.638 68.961,96.139 69.215,95.885 72.517,95.885 72.898,96.266 72.898,99.822 73.717,100.641 MCU.3
NetC14_1: C14.1 R6.1 R7.2 | length 10.9
  S1 w0.3: v1(68.707,83.566) R7.2 ; R6.1 v1(68.707,89.281) 68.72,89.294 68.72,90.919 C14.1
  S2 w0.3: v1(68.707,83.566) 68.707,83.668 67.945,84.43 67.945,88.475 68.707,89.237 v1(68.707,89.281)
NRST: C9.2 MCU.4 R5.1 | length 3.8
  S1 w0.3: R5.1 76.987,98.704 76.987,99.191 77.29,99.494 77.29,99.789 77.45,99.949 C9.2 77.524,99.895 79.655,99.895 MCU.4
PS_INT: MCU.28 PS.7 R1.1 | length 11.5
  S1 w0.2: MCU.28 84.547,103.879 84.547,104.541 84.723,104.717 87.064,104.717 88.442,106.095 88.488,106.095 88.519,106.126 R1.1 89.789,106.172 90.678,105.283 93.345,105.283 93.472,105.41 93.472,105.937 PS.7
PS_SCL: MCU.29 PS.2 R2.1 | length 14.7
  S1 w0.2: MCU.29 83.747,103.879 83.747,104.912 83.952,105.117 84.67,105.117 85.648,106.095 85.694,106.095 85.725,106.126 R2.1 86.106,106.172 87.376,107.442 87.376,107.823 89.281,109.728 92.837,109.728 93.472,109.093 93.472,107.931 PS.2
PS_SDA: MCU.30 PS.8 R3.1 | length 15.7
  S1 w0.2: MCU.30 82.804,103.736 R3.1 82.804,106.14 82.835,106.108 84.264,106.108 v1(84.328,106.045) ; v1(88.138,104.648) 93.726,104.648 94.488,105.41 94.488,105.903 PS.8
  S2 w0.2: v1(84.328,106.045) 85.09,105.283 87.376,105.283 88.011,104.648 v1(88.138,104.648)
REC_OUTPUT: IC1.4 MCU.21 | length 40.1
  S1 w0.36: IC1.4 81.407,88.265 81.915,87.757 81.915,85.555 82.126,85.344 94.361,85.344 95.25,86.233 95.25,99.611 95.039,99.822 88.204,99.822 MCU.21
SW: Ureg.4 Ureg.5 | length 2.2
  S1 w0.5: Ureg.4 78.029,117.183 78.029,119.033 Ureg.5
SW_CLK: MCU.24 pad.7@98.267,101.567 | length 10.5
  S1 w0.3: MCU.24 88.306,102.362 96.647,102.362 97.156,101.853 97.317,101.692 98.143,101.692 pad.7@98.267,101.567
SW_DIO: MCU.23 pad.7@98.298,100.33 | length 10.6
  S1 w0.3: MCU.23 88.217,101.473 96.266,101.473 97.348,100.391 98.237,100.391 pad.7@98.298,100.33
V_IN: Cin.2 D1.1 Ureg.2 | length 3.8
  S1 w0.5: 70.993,118.999 71.031,119.037 Cin.2 72.394,119.033 Ureg.2
V_TVS: D1.2 F1.2 TVS.2 | length 2.4
  S1 w0.5: F1.2 68.641,118.999 68.657,118.983 TVS.2@68.691,118.983 ; TVS.2 D1.2@69.85,118.983
pads on no net: AC.2 AC.3 AC.11 IC1.5 IC1.8 J1.6 J1.MH1 J1.MH2 MCU.6 MCU.7 MCU.8 MCU.14 MCU.15 MCU.18 MCU.19 MCU.20 MCU.25 MCU.26 MCU.27 PS.4 PS.5 PS.6 Ureg.6 Ureg.7 Ureg.9

## Polygon pours and split planes (outlines as drawn)
+12 on S1 "+12_L01_P000" (solid, pour order 0): 61.214,101.727 60.579,102.362 60.579,108.077 63.373,110.871 63.373,117.348 65.532,119.507 66.675,119.507 66.929,119.253 66.929,117.983 66.421,117.475 66.421,102.108 66.04,101.727
GND on S1 "GND_L01_P002" (solid, pour order 2): 71.12,103.124 71.12,116.459 71.501,116.84 72.644,116.84 72.898,117.094 72.898,117.729 72.771,117.856 69.215,117.856 69.088,117.983 69.088,118.237 68.961,118.364 68.453,118.364 68.199,118.11 68.199,102.616 66.421,100.838 60.96,100.838 59.563,102.235 59.69,102.362 59.69,106.426 59.309,106.807 57.15,106.807 56.642,106.299 56.642,100.711 59.563,97.79 64.77,97.79 66.04,99.06 69.723,99.06 69.85,99.187 69.85,100.584 70.231,100.965 70.612,100.965 70.739,101.092 70.739,102.87 70.866,102.997 70.993,102.997
3V3 on S1 "3V3_L01_P003" (solid, pour order 3): 75.762,118.278 75.825,118.215 75.825,115.703 75.819,115.697 76.454,115.062 76.835,115.062 76.973,114.924 76.973,114.18 76.969,114.18 76.835,114.046 76.2,114.046 75.819,113.665 75.819,103.378 76.378,102.819 80.315,102.819 80.518,102.616 80.518,101.981 80.456,101.919 74.23,101.919 73.152,102.997 73.152,111.484 71.158,113.479 71.158,115.064 71.165,115.064 71.926,115.824 72.898,115.824 73.533,116.459 73.533,117.856 74.018,118.341 75.747,118.341 75.824,118.263 75.824,118.22
3V3 on S1 "3V3_L01_P004" (solid, pour order 4): 75.819,107.442 85.852,107.442 85.852,107.449 87.122,108.719 87.122,109.855 87.503,110.236 87.503,111.379 75.819,111.379
GND on S2 "GND_L02_P006" (solid, pour order 6): 26.416,124.587 26.416,124.46 26.416,82.169 98.463,82.169 98.481,82.151 98.933,82.603 98.933,124.714 26.416,124.714

## Other copper
S1:
  text "3V3" at 97.178,97.305 h0.8
  text "CLK" at 97.178,96.162 h0.8
  text "DIO" at 97.178,95.019 h0.8
  text "GND" at 97.178,93.749 h0.8